# Altium PCB PCB1.PcbDoc
Units mm, origin at the board's own origin, x right, y up, seen from the top; angles counter-clockwise.
Board outline 77.61 x 42.25 mm, 2 copper layers (Top Layer, Bottom Layer); 17 components, 19 nets, 90 pads, 1 vias.
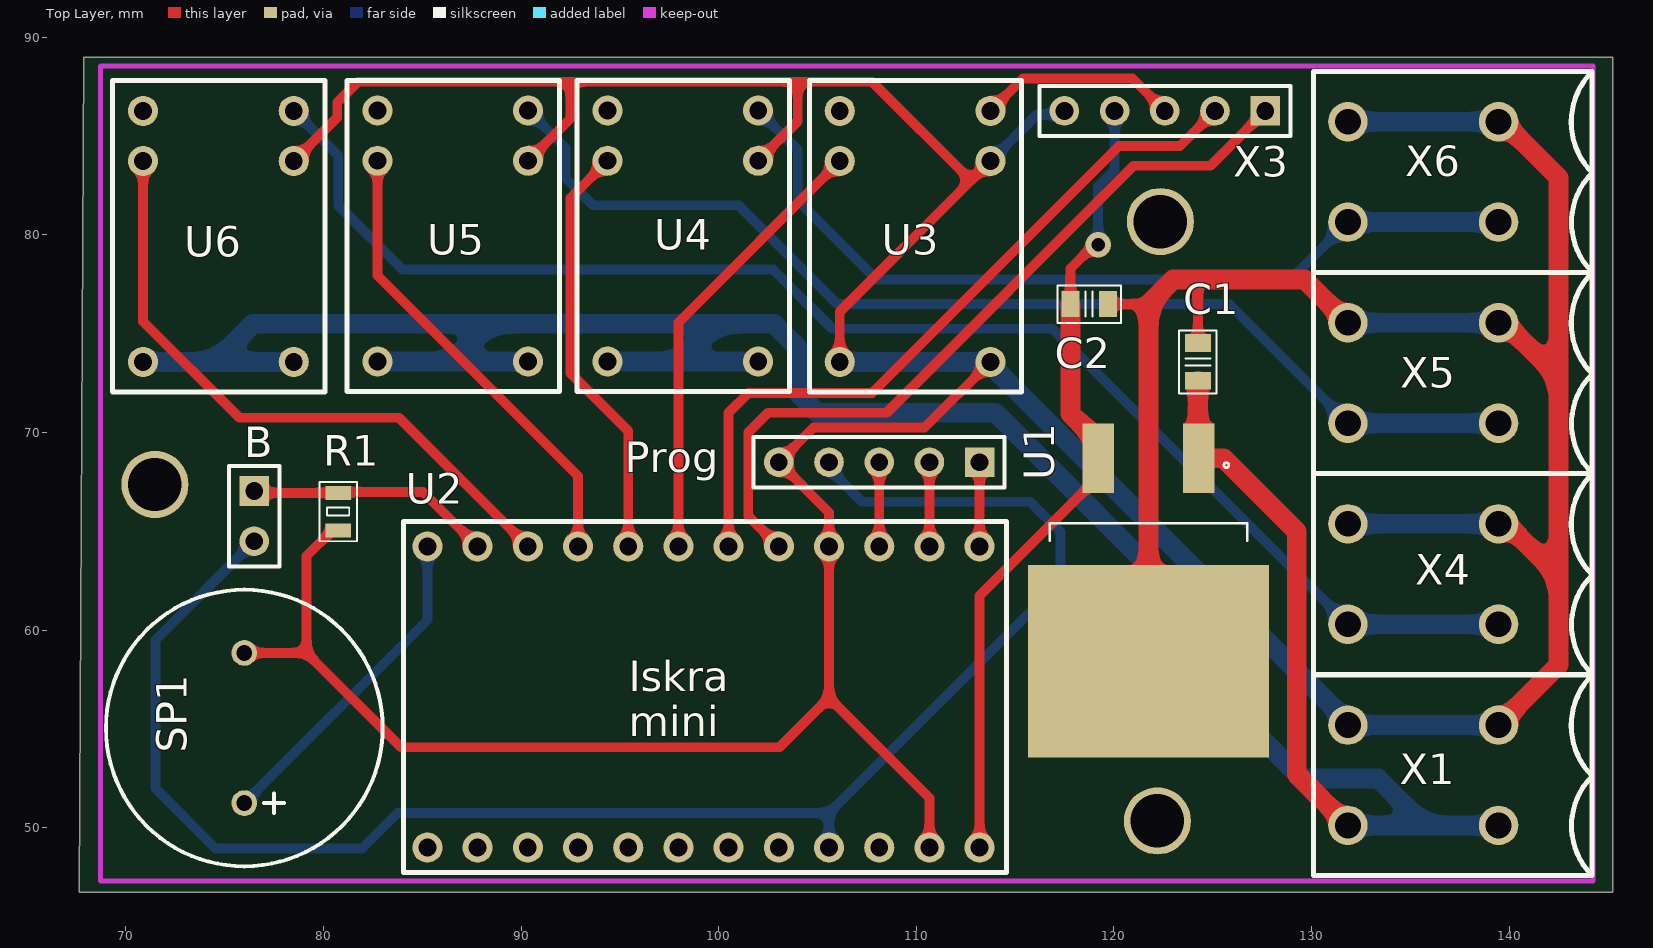
[diagram p0: Top Layer view]
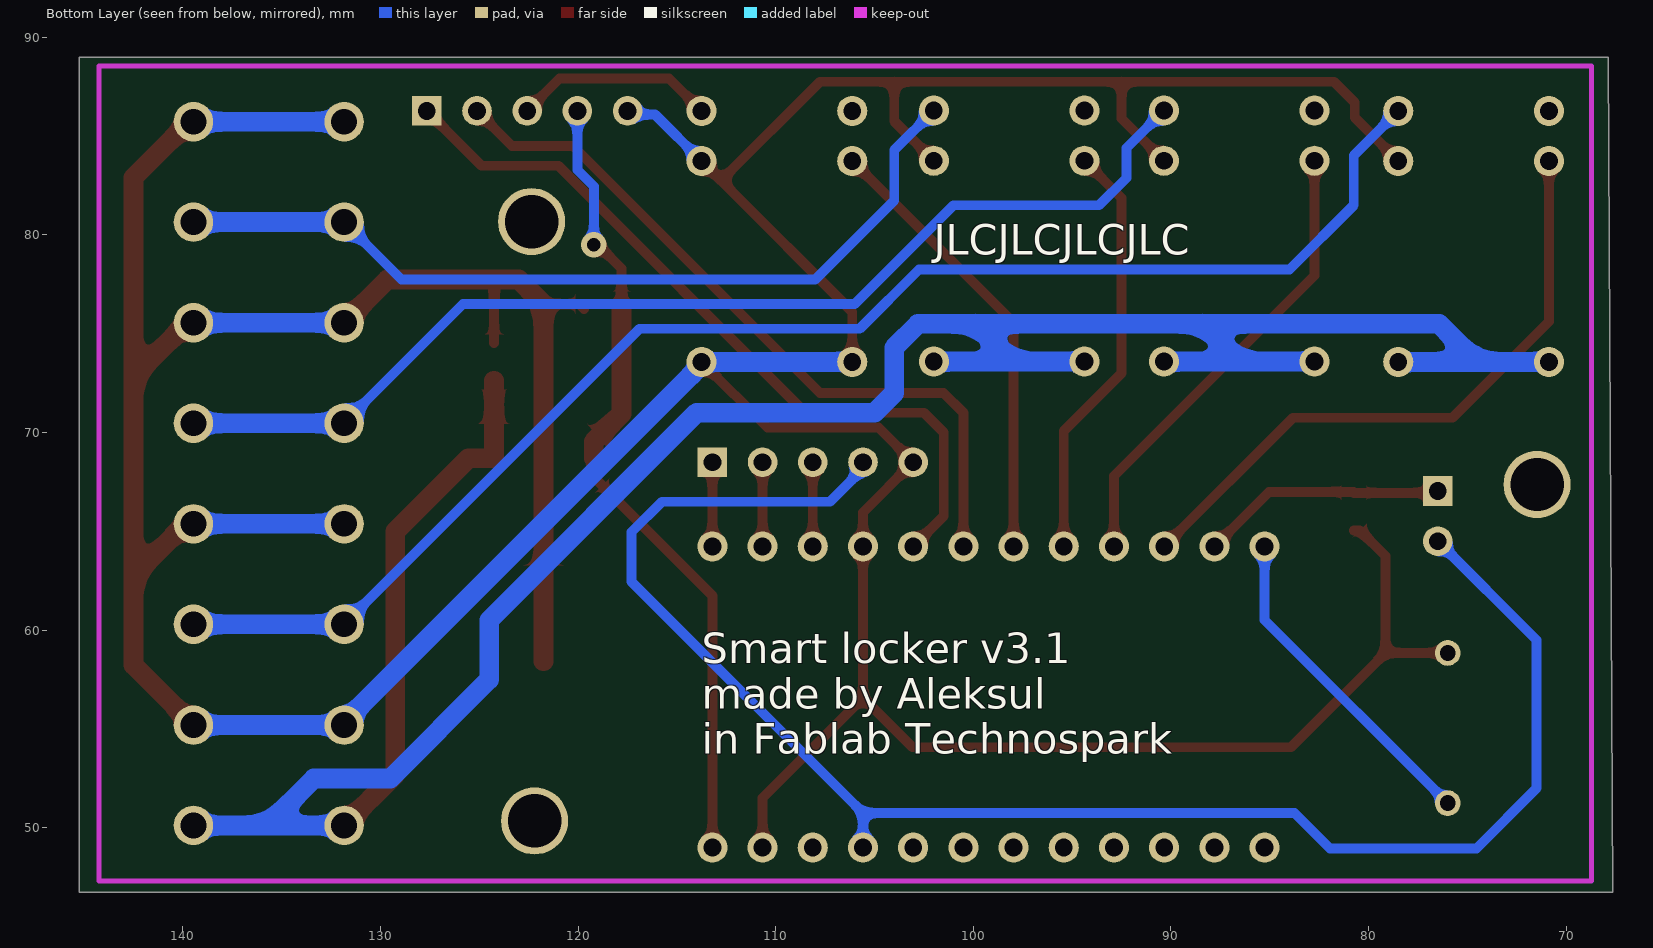
[diagram p1: Bottom Layer view, seen from below]

## Layer stack, top to bottom
Top Solder: solder mask 0.0102, Solder Resist, Dk 3.5
Top Layer: signal copper 0.0356
Dielectric 1: dielectric 0.32, FR-4, Dk 4.8
Bottom Layer: signal copper 0.0356
Bottom Solder: solder mask 0.0102, Solder Resist, Dk 3.5

## Board outline
67.878,89 145.25,89 145.25,46.75 67.638,46.75
cut-out: 70.25,88.55

## Design rules (kind name [scope] priority, off if disabled: settings)
Clearance [All] p1: gap=0.254 ignorepadtopadclearanceinfootprint=FALSE except(0: Arc-Hole Track-Hole SMDPad-Hole THPad-Hole Via-Hole Fill-Hole Poly-Hole Region-Hole Text-Hole)
ComponentClearance [(HasFootprint('*VREG_L7805ACD2T') OR HasFootprint('Beeper_14x7.5') OR HasFootprint('C_0805') OR HasFootprint('Iskra Mini') OR HasFootprint('PLS-2-3D') OR HasFootprint('PLS-5-3D') OR HasFootprint('Relay 5V') OR HasFootprint('R_0805')) vs (HasFootprint('*VREG_L7805ACD2T') OR HasFootprint('Beeper_14x7.5') OR HasFootprint('C_0805') OR HasFootprint('Iskra Mini') OR HasFootprint('PLS-2-3D') OR HasFootprint('PLS-5-3D') OR HasFootprint('Relay 5V') OR HasFootprint('R_0805'))] p1: gap=0.254 collisioncheckmode=3 verticalgap=0.254 showdistances=FALSE
PolygonConnect [All] p1: connectstyle=Relief reliefconductorwidth=0.254 reliefentries=4 polygonreliefangle="90 Angle" airgapwidth=0.254
RoomDefinition Клеемники [False] p1: confinementstyle=ConfineIn formatcopy=TRUE lockcomponents=TRUE outline 129.9,88.5 144.475,88.5 144.475,47.425 129.9,47.425
RoutingVias [All] p1: holewidth=0.711 width=1.27 viastyle="Through Hole" minholewidth=0.711 minwidth=1.27 maxholewidth=0.711 maxwidth=1.27
SolderMaskExpansion [All] p1: expansion=0.102
Width [All] p1: maxlimit=1 minlimit=0.254 preferedwidth=0.5 minimp=50.000000 maximp=50.000000 favimp=50.000000
29 further rules are at their usual default settings.

## Components (designator, comment, footprint, x,y, rotation, side; value= is the part's Value field where it differs from the comment)
B "PLS-2" PLS-2-3D 76.5,67.04 r270 top (schematic designator X7)
C1 "0.33uF" C_0805 124.25,73.575 r270 top
C2 "0.1uF" C_0805 118.75,76.5 r180 top
Prog "PLS-5" PLS-5-3D 113.205,68.5 r180 top (schematic designator X2)
R1 "10k" R_0805 80.75,66 r90 top
SP1 "HPM14A(X)" Beeper_14x7.5 76,51.25 r90 top
U1 "L7809CD2T-TR" *VREG_L7805ACD2T 121.75,62 r270 top
U2 "Iskra_mini" ISKRA_MINI_L 59.865,74.4 r180 top
U3 "NRP-02-C-05DH" "Relay 5V" 111.21,40.555 r270 top
U4 "NRP-02-C-05DH" "Relay 5V" 99.46,40.57 r270 top
U5 "NRP-02-C-05DH" "Relay 5V" 87.82,40.57 r270 top
U6 "NRP-02-C-05DH" "Relay 5V" 75.96,40.555 r270 top
X1 "PLS-2" DG142R-5.08-02P-14 142,50.12 r180 top
X3 "PLS-5" PLS-5-3D 127.655,86.275 r180 top
X4 "PLS-2" DG142R-5.08-02P-14 142,60.3 r180 top
X5 "PLS-2" DG142R-5.08-02P-14 142,70.475 r180 top
X6 "PLS-2" DG142R-5.08-02P-14 142,80.65 r180 top

## Footprints (in the part's own frame and the unit in brackets; to place one, negate y for a bottom-side part, rotate by r counter-clockwise, add the part's x,y. Pads: shape width x height; smd on the part's side, far side on the other; paste and mask are expansions set on the pad)
*VREG_L7805ACD2T [mm]
  rect 3.5x1.6 smd: 1(-6.7,2.54) 3(-6.7,-2.54)
  rect 9.75x12.2 smd: 4(3.575,0)
  silkscreen extent -6.48,-5 -2.51,5
Beeper_14x7.5 [mm]
  round 1.3 hole 0.8: 1(0,0) 2(7.6,0)
  silkscreen extent -3.2,-7 10.8,7, body extent -3.05,-6.85 10.65,6.85, height 7.59
C_0805 [mm] "Capacitor Pattern"
  rect 0.9x1.3 smd: 1(-0.95,0) 2(0.95,0)
  silkscreen extent -1.6,-0.95 1.6,0.95, body extent -1,-0.63 1,0.62, height 0.6
DG142R-5.08-02P-14 [mm] "KLS 5.08mm"
  round 2 hole 1.3: 1(2.54,0) 1(10.16,0) 2(2.54,-5.08) 2(10.16,-5.08)
  silkscreen extent -2.2,-7.62 11.91,2.54
ISKRA_MINI_L [mil] "Iskra mini, but less pins"
  round 60 hole 35.43: 1(-2100,1000) 2(-2000,1000) 3(-1900,1000) 4(-1800,1000) 5(-1700,1000) 6(-1600,1000) 7(-1500,1000) 8(-1400,1000) 9(-1300,1000) 10(-1200,1000) 11(-1100,1000) 12(-1000,1000) 13(-2100,400) 14(-2000,400) 15(-1900,400) 16(-1800,400) 17(-1700,400) 18(-1600,400) 19(-1500,400) 20(-1400,400) 21(-1300,400) 22(-1200,400) 23(-1100,400) 24(-1000,400)
  silkscreen extent -2153,350 -952,1049
PLS-2-3D [mm] "Connector; Header; 2 Position"
  rect 1.5x1.5 hole 0.9: 1(0,0)
  round 1.5 hole 0.9: 2(2.54,0)
  silkscreen extent -1.27,-1.27 3.81,1.27, body extent -1.27,-1.27 3.81,1.27, height 8.44
PLS-5-3D [mm] "Connector; Header; 5 Position"
  rect 1.5x1.5 hole 0.9: 1(0,0)
  round 1.5 hole 0.9: 2(2.54,0) 3(5.08,0) 4(7.62,0) 5(10.16,0)
  silkscreen extent -1.27,-1.27 11.43,1.27, body extent -1.27,-1.27 11.43,1.27, height 8.44
R_0805 [mm] "Resistor Pattern"
  rect 0.7x1.3 smd: 1(-0.95,0) 2(0.95,0)
  silkscreen extent -1.5,-0.95 1.5,0.95, body extent -1,-0.6 1,0.6, height 0.5
"Relay 5V" [mil] "NRP-02-C-05DH"
  round 60 hole 35.43: 1(-1300,-200) 1(-1300,100) 2(-1800,100) 3(-1800,-200) 4(-1700,-200) 5(-1700,100)
  silkscreen extent -1860,-261 -1240,162

## Part data
B X1 X4 X5 X6: "Header, 2-Pin", LatestRevisionDate=17-Jul-2002, LatestRevisionNote="Re-released for DXP Platform.", Publisher="Altium Limited"
C1 C2: library part C0805, "Capacitor"
Prog X3: "Header, 5-Pin", LatestRevisionDate=17-Jul-2002, LatestRevisionNote="Re-released for DXP Platform.", Publisher="Altium Limited"
R1: library part R0805, "Resistor"
SP1: "Speaker with (AX)/without (A) frequency grnerator"
U3 U4 U5 U6: library part Relay

## Free pads (board coordinates)
  round 3.4 hole 2.7: 73(122.35,80.675) 74(71.475,67.375) 75(122.2,50.35)

## Via types
v1: diameter 1.3, hole 0.7, Top Layer to Bottom Layer, 1 vias

## Nets (pads, with @x,y where several pads share a name; then routed paths per layer and width w, separated by ;. In a path a pad name is that pad's centre, name@x,y a point inside that pad or via, vN(x,y) a via of type N, cw(c..) or ccw(c..) an arc to the next point about the centre after c; other vN are vias at no path point)
+5: B.2 Prog.4 U2.4 | length 84.8
  Bottom Layer w0.5: B.2 71.5,59.5 71.5,52 74.543,48.957 81.957,48.957 83.75,50.75 105.585,50.75 ; U2.4 105.585,50.75 ; Prog.4 105.776,68.309 105.776,67.974 107.25,66.5 115.75,66.5 117.288,64.962 117.288,62.453 105.585,50.75
+9: C2.2 U1.3 U2.1 X3.4 | length 41.5
  Top Layer w0.5: U2.1 113.205,61.745 119.21,67.75 U1.3 ; C2.2 117.8,78.3 118.855,79.355 v1@118.855,79.645 ; X3.4@120.035,86.004 X3.4
  Top Layer w1: C2.2 117.8,70.95 119.21,69.54 U1.3
  Bottom Layer w0.5: v1(119.21,79.5) 119.199,79.511 119.199,82.449 120.035,83.285 X3.4
Button: B.1 R1.2 U2.23 | length 12.5
  Top Layer w0.5: B.1 76.59,66.95 R1.2 ; R1.2@80.75,67 85.045,67 U2.23
GND: C1.1 C2.1 Prog.5 R1.1 SP1.2 U1.4 U2.2 U2.16 U3.1 U3.5 U4.5 U5.5 U6.5 X1.2 X3.5 X4.2 X5.2 X6.2 | length 281.9
  Top Layer w0.5: SP1.2@75.841,58.85 SP1.2 79.15,58.85 ; U6.5 80.7,85.935 80.7,86.7 81.75,87.75 92.496,87.75 ; R1.1 80.45,65.05 79.15,63.75 79.15,58.85 ; U5.5 92.496,85.886 92.496,87.75 ; U4.5 104,85.75 104,87.75 ; U3.1@106.13,73.575 106.13,76.115 112.765,82.75 ; U2.2 110.665,51.505 105.585,56.585 ; U3.1@113.75,73.575 110.425,70.25 104.795,70.25 Prog.5 105.585,65.96 U2.16 105.585,56.585 ; U3.5 112.765,82.75 ; C2.1@119.7,76.25 119.95,76.5 121.75,76.5 ; C1.1 124.25,77.75 ; X6.2@139.46,85.73 X6.2@139.668,85.73 ; 79.15,58.85 83.92,54.08 103.08,54.08 105.585,56.585 ; 92.496,87.75 104,87.75 ; 104,87.75 107.765,87.75 112.765,82.75
  Top Layer w1: U1.4 121.75,76.5 123,77.75 124.25,77.75 129.645,77.75 X5.2@131.84,75.555 ; X1.2@139.46,55.2 142.5,58.24 142.5,62.75 ; X4.2@139.46,65.38 139.87,65.38 142.5,62.75 ; X5.2@139.46,75.555 139.769,75.555 142.5,72.824 ; X6.2@139.668,85.73 142.5,82.898 142.5,72.824 ; 142.5,62.75 142.5,72.824
  Bottom Layer w0.5: U3.1@113.75,73.432 U3.1@113.75,73.575 ; U3.5 116.099,86.084 117.304,86.084 X3.5 ; X1.2@131.84,55.2 X1.2@131.84,55.343
  Bottom Layer w1: U3.1@106.13,73.575 U3.1@113.75,73.575 ; U3.1@113.75,73.432 X1.2@131.84,55.343 ; X1.2@131.84,55.2 X1.2@139.46,55.2 ; X4.2@131.84,65.38 X4.2@139.46,65.38 ; X5.2@131.84,75.555 X5.2@139.46,75.555 ; X6.2@131.84,85.73 X6.2@139.46,85.73
LED: U3.2 X3.3 | length 10.2
  Top Layer w0.5: U3.2 115.394,87.919 120.931,87.919 X3.3
LED_Pin: U2.19 U3.4 | length 22.9
  Top Layer w0.5: U2.19 97.965,75.57 U3.4
Lock1: U2.20 U4.4 | length 21.5
  Top Layer w0.5: U4.4 92.5,81.87 92.5,73 95.425,70.075 U2.20
Lock2: U2.21 U5.4 | length 23.7
  Top Layer w0.5: U5.4 82.74,77.956 92.885,67.811 U2.21
Lock3: U2.22 U6.4 | length 32.3
  Top Layer w0.5: U6.4 70.88,75.62 75.75,70.75 83.835,70.75 U2.22
NetSP1_1: SP1.1 U2.24 | length 16.8
  Bottom Layer w0.5: SP1.1 85.265,60.515 U2.24
NetU4_2: U4.2 X6.1 | length 43.7
  Bottom Layer w0.5: U4.2 104,84.29 104,81.75 108,77.75 128.94,77.75 X6.1@131.84,80.65
  Bottom Layer w1: X6.1@131.84,80.65 X6.1@139.46,80.65
NetU5_2: U5.2 X5.1 | length 56.5
  Bottom Layer w0.5: U5.2 92.25,84.4 92.25,82.885 93.635,81.5 101,81.5 106,76.5 125.815,76.5 X5.1@131.84,70.475
  Bottom Layer w1: X5.1@131.84,70.475 X5.1@139.46,70.475
NetU6_2: U6.2 X4.1 | length 73.2
  Bottom Layer w0.5: U6.2 80.75,84.025 80.75,81.5 84,78.25 102.75,78.25 105.75,75.25 116.89,75.25 X4.1@131.84,60.3
  Bottom Layer w1: X4.1@131.84,60.3 X4.1@139.46,60.3
RST_prog: Prog.3 U2.15 | length 4.3
  Top Layer w0.5: U2.15 Prog.3
RX: Prog.2 U2.14 | length 4.3
  Top Layer w0.5: U2.14 Prog.2
TX: Prog.1 U2.13 | length 4.3
  Top Layer w0.5: U2.13 Prog.1
VCC: C1.2 U1.1 U4.1 U5.1 U6.1 X1.1 | length 137.9
  Top Layer w0.5: U1.1@124.25,68.74 U1.1
  Top Layer w1: U1.1@124.25,68.74 C1.2 ; U1.1 125.55,68.7 129.25,65 129.25,52.71 X1.1@131.84,50.12
  Bottom Layer w1: U6.1@70.88,73.575 74.5,73.575 ; U6.1@78.5,73.575 74.5,73.575 ; U5.1@82.74,73.59 86.5,73.59 ; U5.1@90.36,73.59 86.5,73.59 ; U4.1@94.38,73.59 98,73.59 ; U4.1@102,73.59 98,73.59 ; X1.1@131.84,50.12 135.75,50.12 ; X1.1@139.46,50.12 135.75,50.12 ; 74.5,73.575 76.425,75.5 88.41,75.5 ; 86.5,73.59 88.41,75.5 ; 88.41,75.5 99.91,75.5 ; 98,73.59 99.91,75.5 ; 99.91,75.5 102.795,75.5 104,74.295 104,72 105,71 114,71 124.5,60.5 124.5,57.5 129.5,52.5 133.37,52.5 135.75,50.12
W0: U2.17 X3.1 | length 39.3
  Top Layer w0.5: U2.17 101.5,65.785 101.5,70 102.504,71.004 108.504,71.004 121,83.5 124.88,83.5 X3.1
W1: U2.18 X3.2 | length 37.7
  Top Layer w0.5: U2.18 100.505,71.005 101.504,72.004 107.754,72.004 120.25,84.5 123.34,84.5 X3.2
pads on no net: U2.3 U2.5 U2.6 U2.7 U2.8 U2.9 U2.10 U2.11 U2.12 U3.3 U4.3 U5.3 U6.3

## Keep-outs
Keep-Out Layer:
  lines w0.254: 68.725,47.3 144.25,47.3 144.25,88.55 68.725,88.55 68.725,47.3

## Silkscreen, mask and mechanical layers (free items; w line width, h text height)
Bottom Overlay:
  text "JLCJLCJLCJLC" at 102,79 h1.52
  text "Smart locker v3.1 / made by Aleksul  / in Fablab Technospark" at 113.75,53.75 h1.52

## Text inside footprints (layer, text, board x,y; h text height)
U2: Top Overlay "Iskra / mini" at 95.45,54.625 h1.52